# Altium PCB PCB1.PcbDoc
Units mil, origin at the board's own origin, x right, y up, seen from the top; angles counter-clockwise.
Board outline 1675 x 1450 mil, 2 copper layers (Top Layer, Bottom Layer); 9 components, 43 nets, 99 pads, 5 vias.
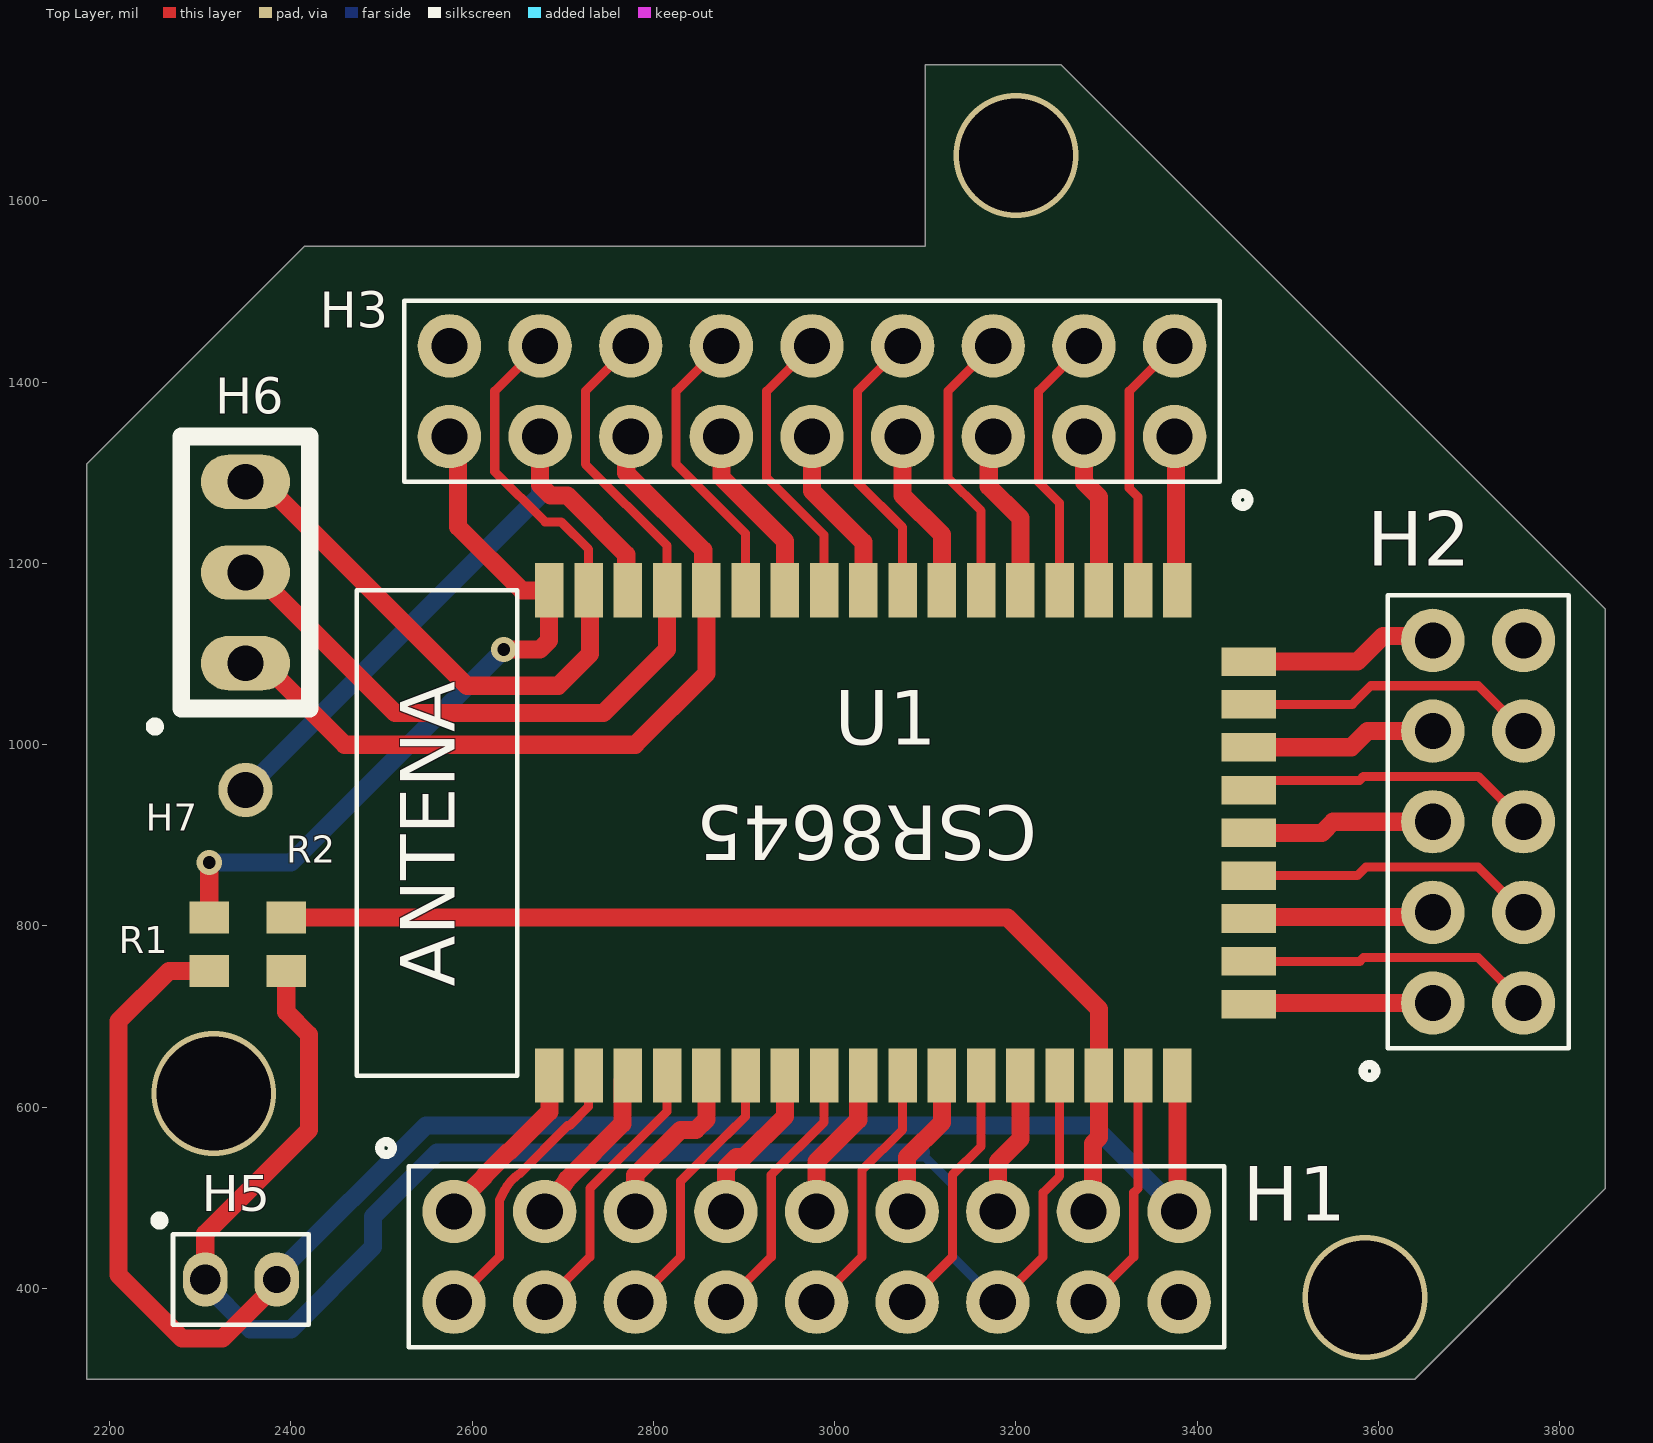
[diagram p0: Top Layer view]
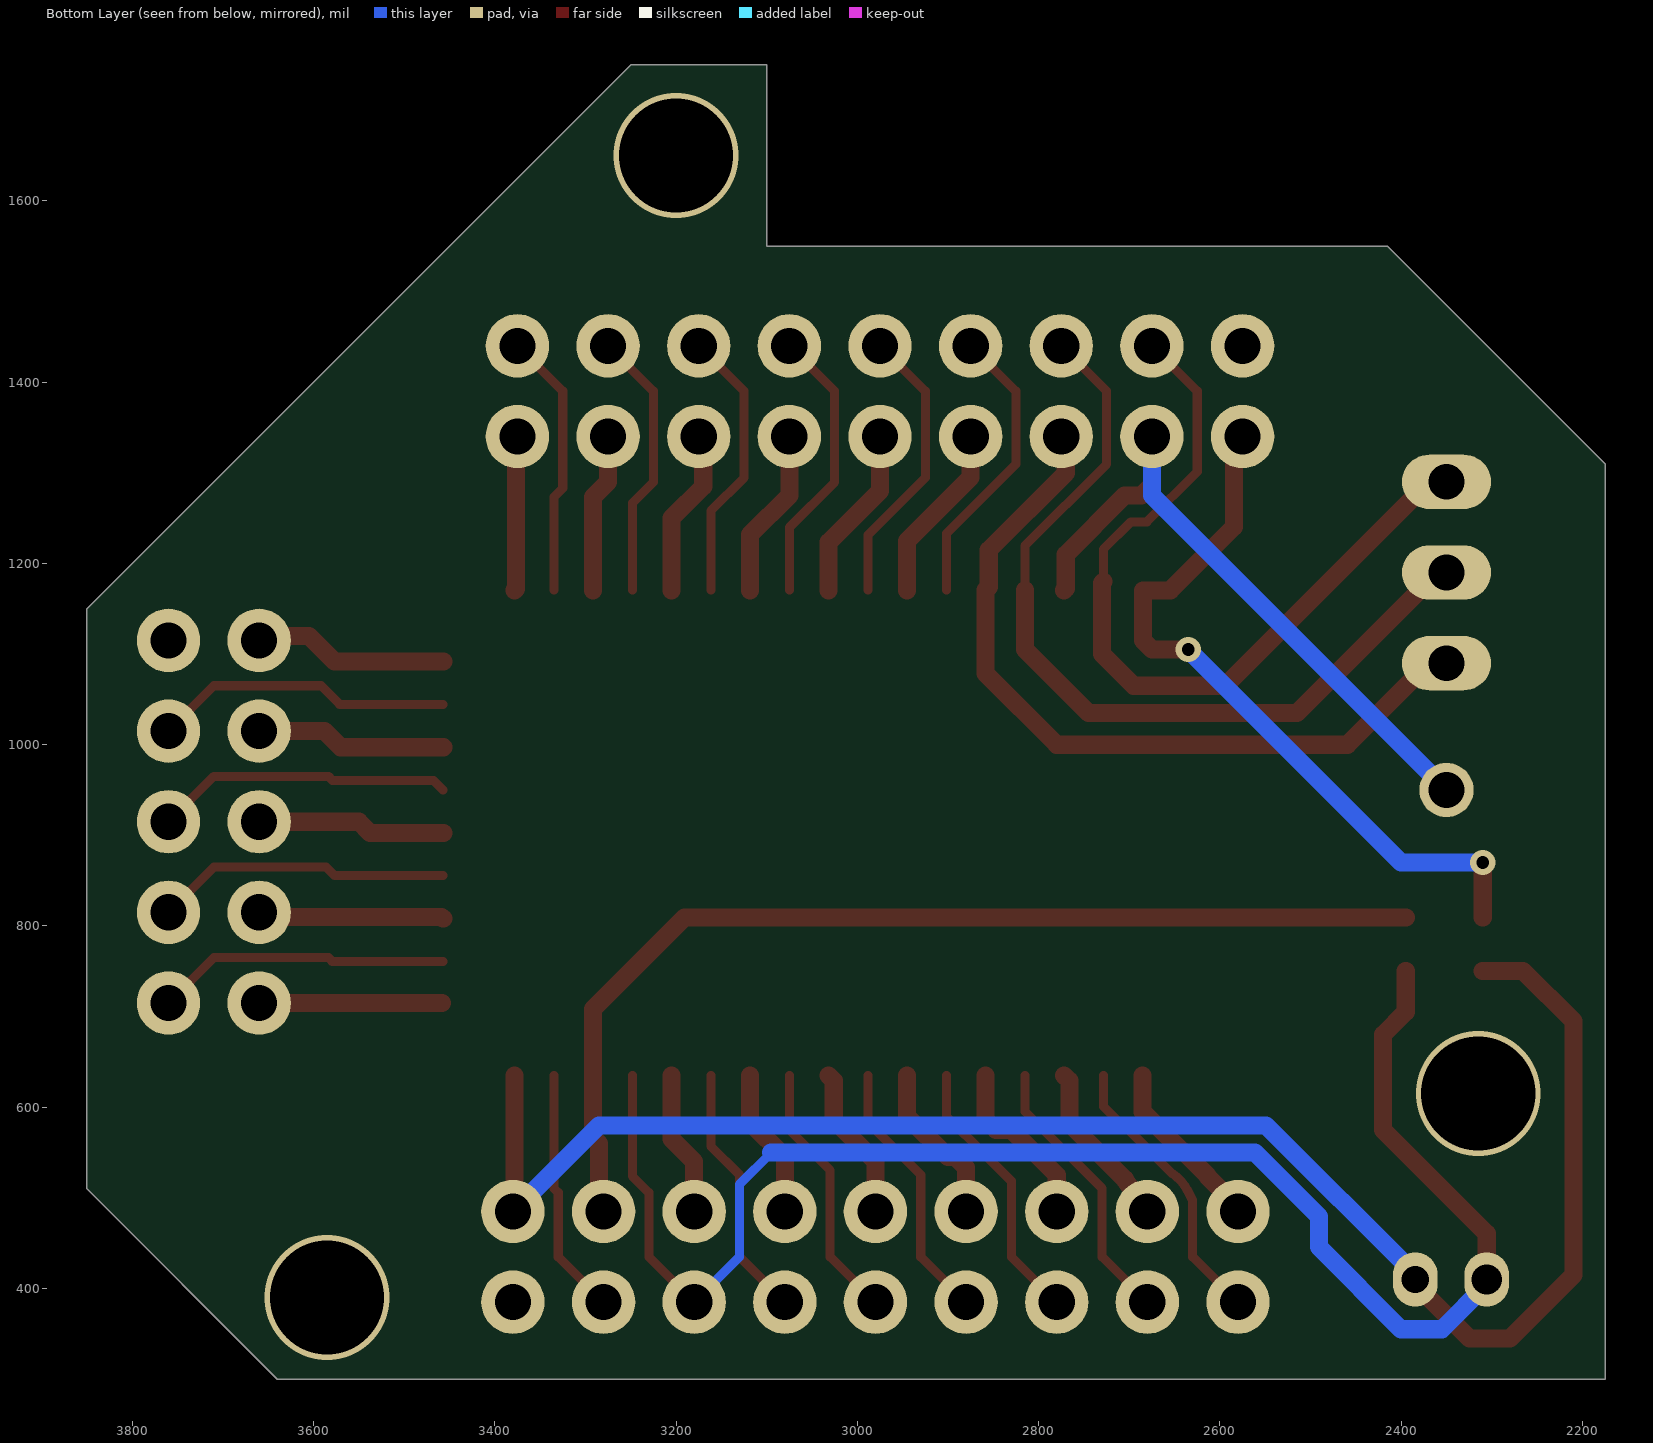
[diagram p1: Bottom Layer view, seen from below]

## Layer stack, top to bottom
Top Solder: solder mask 0.4, Solder Resist, Dk 3.5
Top Layer: signal copper 1.4
Dielectric 1: dielectric 12.6, FR-4, Dk 4.8
Bottom Layer: signal copper 1.4
Bottom Solder: solder mask 0.4, Solder Resist, Dk 3.5

## Board outline
2175,300 2175,1310 2415,1550 3100,1550 3100,1750 3250,1750 3850,1150 3850,510 3640,300

## Design rules (kind name [scope] priority, off if disabled: settings)
Clearance [All] p1: gap=10 ignorepadtopadclearanceinfootprint=FALSE except(0: Arc-Hole Track-Hole SMDPad-Hole THPad-Hole Via-Hole Fill-Hole Poly-Hole Region-Hole Text-Hole)
PolygonConnect [All] p1: connectstyle=Relief reliefconductorwidth=10 reliefentries=4 polygonreliefangle="90 Angle" airgapwidth=10
RoutingVias [All] p1: holewidth=14 width=30 viastyle="Through Hole" minholewidth=10 minwidth=25 maxholewidth=70 maxwidth=5000
SolderMaskExpansion [All] p1: expansion=4 istentingtop=FALSE
Width [All] p1: maxlimit=100 minlimit=10 preferedwidth=10 minimp=50.000000 maximp=50.000000 favimp=50.000000
30 further rules are at their usual default settings.

## Components (designator, comment, footprint, x,y, rotation, side; value= is the part's Value field where it differs from the comment)
H1 "dip18 header" "dip18 header" 2580,385 r0 top
H2 "dip10 header" "dip10 header" 3760,715 r90 top
H3 "dip18 header" "dip18 header" 3375,1440 r180 top
H5 "Pin Header P=2mm" "Pin Header P=2mm" 2345,410 r0 top
H6 "DIP3 header" DIP3 2350,1190 r90 top
H7 "via" via 2350,950 r0 top
R1 "0Om" RESC1608X55X30ML20T10 2310,780 r270 top
R2 "0Om" RESC1608X55X30ML20T10 2395,780 r270 top
U1 "CSR8645" CSR8645 3456.89,902.72 r90 top

## Footprints (in the part's own frame and the unit in brackets; to place one, negate y for a bottom-side part, rotate by r counter-clockwise, add the part's x,y. Pads: shape width x height; smd on the part's side, far side on the other; paste and mask are expansions set on the pad)
CSR8645 [mm]
  rect 1.524x0.8 smd: 1(-6.8,19.6) 2(-6.8,18.5) 3(-6.8,17.4) 4(-6.8,16.3) 5(-6.8,15.2) 6(-6.8,14.1) 7(-6.8,13) 8(-6.8,11.9) 9(-6.8,10.8) 10(-6.8,9.7) 11(-6.8,8.6) 12(-6.8,7.5) 13(-6.8,6.4) 14(-6.8,5.3) 15(-6.8,4.2) 16(-6.8,3.1) 17(-6.8,2) 27(6.8,2) 28(6.8,3.1) 29(6.8,4.2) 30(6.8,5.3) 31(6.8,6.4) 32(6.8,7.5) 33(6.8,8.6) 34(6.8,9.7) 35(6.8,10.8) 36(6.8,11.9) 37(6.8,13) 38(6.8,14.1) 39(6.8,15.2) 40(6.8,16.3) 41(6.8,17.4) 42(6.8,18.5) 43(6.8,19.6)
  rect 0.8x1.524 smd: 18(-4.8,0) 19(-3.6,0) 20(-2.4,0) 21(-1.2,0) 22(0,0) 23(1.2,0) 24(2.4,0) 25(3.6,0) 26(4.8,0)
  silkscreen extent -6.8,20.5 6.8,25
DIP3 [mm]
  oval 1.524x2.5 hole 1: 1(-2.54,0) 2(0,0) 3(2.54,0)
  silkscreen extent -4.44,-1.8 3.81,2.67
"dip10 header" [mil]
  round 70 hole 40: 1(0,100) 2(0,0) 3(100,100) 4(100,0) 5(200,100) 6(200,0) 7(300,100) 8(300,0) 9(400,100) 10(400,0)
  silkscreen extent -82,-50 450,177
"dip18 header" [mil]
  round 70 hole 40: 1(0,100) 2(0,0) 3(100,100) 4(100,0) 5(200,100) 6(200,0) 7(300,100) 8(300,0) 9(400,100) 10(400,0) 11(500,100) 12(500,0) 13(600,100) 14(600,0) 15(700,100) 16(700,0) 17(800,100) 18(800,0)
  silkscreen extent -82,-50 850,177
"Pin Header P=2mm" [mm]
  oval 1.25x1.524 hole 0.85: 1(-1,0)
  oval 1.25x1.524 hole 0.762: 2(1,0)
  silkscreen extent -2.41,-1.27 1.91,1.78
RESC1608X55X30ML20T10 [mm] "Chip Resistor, 2-Leads, Body 1.60x0.80mm, IPC Low Density"
  rect 0.9x1.1 smd: 1(-0.75,0) 2(0.75,0)
  body extent -0.9,-0.5 0.9,0.5, height 0.55
via [mil]
  round 60 hole 39.37: 1(0,0)

## Part data
R1 R2: library part CMP-2000-01555-1, Manufacturer="KOA Speer", Part Number=RK73H1JTTD5101F

## Via types
v1: diameter 137.8, hole 125.98, Top Layer to Bottom Layer, 3 vias
v2: diameter 28, hole 14, Top Layer to Bottom Layer, 2 vias

## Nets (pads, with @x,y where several pads share a name; then routed paths per layer and width w, separated by ;. In a path a pad name is that pad's centre, name@x,y a point inside that pad or via, vN(x,y) a via of type N, cw(c..) or ccw(c..) an arc to the next point about the centre after c; other vN are vias at no path point)
NetH1_1: H1.1 U1.1 | length 194.3
  Top Layer w20: H1.1 2580,489.85 2613.73,523.59 2613.73,524.8 2640.2,551.27 2641.41,551.27 2685.24,595.09 U1.1
NetH1_2: H1.2 U1.2 | length 311.6
  Top Layer w10: H1.2 2630,435 2630,497.64 2636.01,508.76 cw(c2680,485) 2651.77,526.27 2705.25,579.75 2707.43,579.75 2728.54,600.86 U1.2
NetH1_3: H1.3 U1.3 | length 185.6
  Top Layer w20: H1.3 2705,520.71 2766.1,581.81 2766.1,629.25 U1.3
NetH1_4: H1.4 U1.4 | length 306
  Top Layer w10: H1.4 2730,435 2730,510.36 2815.16,595.51 U1.4
NetH1_5: H1.5 U1.5 | length 192.3
  Top Layer w20: H1.5 2780,525 2830,575 2846.75,575 2858.46,586.72 U1.5
NetH1_6: H1.6 U1.6 | length 300.7
  Top Layer w10: H1.6 2830,435 2830,518.64 2881.36,570 2881.77,570 2901.77,590 U1.6
NetH1_7: H1.7 U1.7 | length 181.8
  Top Layer w20: H1.7 2880,533.28 2891.72,545 2900,545 2945,590 2945,634.92 U1.7
NetH1_8: H1.8 U1.8 | length 294.9
  Top Layer w10: H1.8 2930,435 2930,525.36 2988.39,583.74 U1.8
NetH1_9: H1.9 U1.9 | length 171.4
  Top Layer w20: H1.9 2980,540 3025.94,585.94 3025.94,629.25 U1.9
NetH1_10: H1.10 U1.10 | length 289.4
  Top Layer w10: H1.10 3030,435 3030,530.36 3075,575.36 U1.10
NetH1_11: H1.11 U1.11 | length 165.9
  Top Layer w20: H1.11 3080,545 3118.31,583.31 U1.11
NetH1_12: H1.12 U1.12 | length 283.8
  Top Layer w10: H1.12 3130,435 3130,525.36 3161.61,556.97 U1.12
NetH1_13: H1.13 U1.13 | length 160.3
  Top Layer w20: H1.13 3180,540 3204.92,564.92 U1.13
NetH1_14: H1.14 H5.1 R2.2 U1.14 | length 1792.4
  Top Layer w10: H1.14 3230,435 3230,505.71 3248.23,523.94 U1.14
  Top Layer w20: H5.1 2305.63,460.63 2420,575 2420,680 2395,705 R2.2
  Bottom Layer w10: 3095,550 3130,515 3130,435 H1.14
  Bottom Layer w20: H5.1 2305.63,404.61 2355.24,355 2400,355 2490.7,445.7 2490.7,479.3 2561.4,550 3095,550
NetH1_15: H1.15 R2.1 U1.15 | length 1167.3
  Top Layer w15: R2.1 R2.1@2395.47,810
  Top Layer w20: R2.1 3190.47,809.53 3291.54,708.46 U1.15 3291.54,566.54 3285,560 3285,490 H1.15
NetH1_16: H1.16 U1.16 | length 272.7
  Top Layer w10: H1.16 3330,435 3330,505.71 3334.84,510.55 U1.16
NetH1_17: H1.17 H5.2 R1.2 U1.17 | length 1901.1
  Top Layer w10: H1.17@3378.15,486.85 H1.17
  Top Layer w20: R1.2 2265.47,750.47 2210,695 2210,415 2280,345 2324.76,345 2384.37,404.61 H5.2 H5.2@2384.37,415.39 ; H1.17@3378.15,486.85 U1.17
  Bottom Layer w20: H5.2 2384.37,415.39 2548.98,580 3285,580 H1.17
NetH2_1: H2.1 U1.18 | length 203.6
  Top Layer w10: U1.18 U1.18@3458.15,715
  Top Layer w20: U1.18@3458.15,715 H2.1
NetH2_2: H2.2 U1.19 | length 325.5
  Top Layer w10: U1.19 3579.29,760.98 3583.31,765 3710,765 H2.2
NetH2_3: H2.3 U1.20 | length 205.9
  Top Layer w20: U1.20 3458.66,810 3655,810 H2.3
NetH2_4: H2.4 U1.21 | length 327.8
  Top Layer w10: U1.21 3576.54,855.47 3586.06,865 3710,865 H2.4
NetH2_5: H2.5 U1.22 | length 208.2
  Top Layer w20: U1.22 3537.72,902.72 3550,915 H2.5
NetH2_6: H2.6 U1.23 | length 330.1
  Top Layer w10: U1.23 3467.64,960.71 3579.15,960.71 3583.45,965 3710,965 H2.6
NetH2_7: H2.7 U1.24 | length 210.5
  Top Layer w20: U1.24 3570,997.2 3587.8,1015 H2.7
NetH2_8: H2.8 U1.25 | length 332.3
  Top Layer w10: U1.25 3571.02,1044.45 3591.58,1065 3710,1065 H2.8
NetH2_9: H2.9 U1.26 | length 216.9
  Top Layer w20: U1.26 3576.69,1091.69 3605,1120 3655,1120 H2.9
NetH3_1: H3.1 U1.27 | length 170.9
  Top Layer w20: H3.1 3376.57,1338.43 3376.57,1172.01 U1.27
NetH3_2: H3.2 U1.28 | length 294.4
  Top Layer w10: U1.28 3334.84,1273.15 3325,1282.99 3325,1390 H3.2
NetH3_3: H3.3 U1.29 | length 176.4
  Top Layer w20: H3.3 3275,1290 3291.54,1273.46 U1.29
NetH3_4: H3.4 U1.30 | length 299.9
  Top Layer w10: U1.30 3248.23,1266.46 3225,1289.69 3225,1390 H3.4
NetH3_5: H3.5 U1.31 | length 186.1
  Top Layer w20: H3.5 3170,1335 3170,1285 3204.92,1250.08 U1.31
NetH3_6: H3.6 U1.32 | length 305.4
  Top Layer w10: U1.32 3161.61,1258.03 3125,1294.64 3125,1390 H3.6
NetH3_7: H3.7 U1.33 | length 187.5
  Top Layer w20: H3.7 3075,1275 3118.31,1231.69 U1.33
NetH3_8: H3.8 U1.34 | length 311
  Top Layer w10: U1.34 3075,1239.64 3025,1289.64 3025,1390 H3.8
NetH3_9: H3.9 U1.35 | length 193
  Top Layer w20: H3.9 2975,1280 3031.69,1223.31 U1.35
NetH3_10: H3.10 U1.36 | length 316.5
  Top Layer w10: H3.10 2925,1390 2925,1294.64 2988.39,1231.26 U1.36
NetH3_11: H3.11 U1.37 | length 198.6
  Top Layer w20: H3.11 2875,1295 2945.08,1224.92 U1.37
NetH3_12: H3.12 U1.38 | length 322.1
  Top Layer w10: H3.12 2825,1390 2825,1309.64 2901.77,1232.87 U1.38
NetH3_13: H3.13 H6.1 U1.39 | length 878.5
  Top Layer w20: H6.1 2369.21,1090 2459.21,1000 2780,1000 2858.46,1078.46 U1.39 2855,1173.9 2855,1215 2770,1300 2770,1335 H3.13
NetH3_14: H3.14 H6.2 U1.40 | length 951.3
  Top Layer w10: H3.14 2725,1390 2725,1309.64 2815.16,1219.49 U1.40
  Top Layer w20: H6.2 2360,1190 2515,1035 2745,1035 2815.16,1105.16 U1.40
NetH3_15: H3.15 H7.1 U1.41 | length 745
  Top Layer w20: H3.15 2675,1286.72 2686.72,1275 2705,1275 2770,1210 2770,1172.28 U1.41
  Bottom Layer w20: H7.1 2675,1275 H3.15
NetH3_16: H3.16 H6.3 U1.42 | length 902.2
  Top Layer w10: H3.16 2625,1390 2625,1301.36 2680.46,1245.9 2698.08,1245.9 2728.54,1215.43 U1.42@2728.54,1180
  Top Layer w20: H6.3 2369.21,1290 2594.21,1065 2695,1065 2730,1100 2730,1178.54 U1.42@2728.54,1180
NetH3_17: H3.17 R1.1 U1.43 | length 825.2
  Top Layer w20: R1.1 v2(2310,870) ; H3.17 2584.57,1330.43 2584.57,1240.43 2654.8,1170.2 2685,1170.2 2685,1115 2675,1105 v2(2635,1105)
  Bottom Layer w20: v2(2310,870) 2400,870 v2(2635,1105)
pads on no net: H1.18 H2.10 H3.18
copper on no net:
  other v1: 3585,390 2315,615 3200,1650

## Silkscreen, mask and mechanical layers (free items; w line width, h text height)
Mechanical 1:
  the board outline again, w5

## Text inside footprints (layer, text, board x,y; h text height)
U1: Top Overlay "ANTENA" at 2580.75,732.77 h60 r90